# EAGLE board Brazo Robótico (EAGLE 7.6.0)

Size 73.58 x 63.39 mm. Coordinates in mm from the lower left corner, seen from the top.
Outline: 0,0 56.82,0 56.82,53.33 0,53.33 0,0
Copper layers (1*16): Top 0.035mm / dielectric 1.5mm / Bottom 0.035mm
Design rules "default": minimum track width 10mil, minimum drill 24mil, track to track 8mil, track to pad 8mil, pad to pad 8mil, via to via 8mil, smd to smd 8mil, copper to edge 40mil, drill to drill 8mil, minimum pad ring 10mil, minimum via ring 8mil, stop-mask expansion 4mil, vias tented up to drill 0mil, thermal gap 10mil

## Footprints (pad centres in the part's own frame; a part is rotated, then mirrored left to right if it is on the bottom)
0207/10 = drill 0.813 octagon: 1 -5.08,0; 2 5.08,0
B25V = drill 0.813 long: A 2.54,0.635; E -2.54,0.635; S 0,0.635
M251 = drill 0.813 long: 1 -2.54,0; 2 0,0; 3 2.54,0
TL1105 = drill 1 pad 1.676: 1 -2.25,3.25; 2 2.25,3.25; 3 -2.25,-3.25; 4 2.25,-3.25
1X3P-2.54-2.54-11.6-3.0-BLACK-MALE = drill 0.889 pad 1.651 square: 1 0,2.54 | drill 0.889 pad 1.651: 2 0,0; 3 0,-2.54
ARDUINO_UNO = drill 1.016 pad 1.88: 0 63.5,50.8; 1 60.96,50.8; 2 58.42,50.8; 3 55.88,50.8; 3.3V 35.56,2.54; 4 53.34,50.8; 5 50.8,50.8; 5V 38.1,2.54; 6 48.26,50.8; 7 45.72,50.8; 8 41.656,50.8; 9 39.116,50.8; 10 36.576,50.8; 11 34.036,50.8; 12 31.496,50.8; 13 28.956,50.8; A0 50.8,2.54; A1 53.34,2.54; A2 55.88,2.54; A3 58.42,2.54; A4 60.96,2.54; A5 63.5,2.54; AREF 23.876,50.8; GND 26.416,50.8; GND. 43.18,2.54; GND.. 40.64,2.54; I/OREF 30.48,2.54; N/C 27.94,2.54; RESET 33.02,2.54; SCL 18.796,50.8; SDA 21.336,50.8; VIN 45.72,2.54 | hole 3.2: 66.04,7.62; 66.04,35.56; 15.24,50.8; 13.97,2.54
1X16P-2.54-2.54-11.6-3.0-BLACK-MALE = drill 0.889 pad 1.651 square: 1 0,19.05 | drill 0.889 pad 1.651: 2 0,16.51; 3 0,13.97; 4 0,11.43; 5 0,8.89; 6 0,6.35; 7 0,3.81; 8 0,1.27; 9 0,-1.27; 10 0,-3.81; 11 0,-6.35; 12 0,-8.89; 13 0,-11.43; 14 0,-13.97; 15 0,-16.51; 16 0,-19.05

## Placement (x,y rotation side)
R2  220‎Ω  [0207/10]  5,48.18 0 top
R4  220‎Ω  [0207/10]  5,86.28 0 top  (outside the outline)
R6  220‎Ω  [0207/10]  5,98.98 0 top  (outside the outline)
Rpot1  250k‎Ω  [B25V]  5,35.48 0 top
Rpot2  250k‎Ω  [B25V]  5,225.98 0 top  (outside the outline)
Rpot3  250k‎Ω  [B25V]  5,162.48 0 top  (outside the outline)
Rpot4  250k‎Ω  [B25V]  5,175.18 0 top  (outside the outline)
Rpot5  250k‎Ω  [B25V]  5,187.88 0 top  (outside the outline)
Rpot6  250k‎Ω  [B25V]  5,200.58 0 top  (outside the outline)
S1  [M251]  5,238.68 0 top  (outside the outline)
S3  [TL1105]  5,60.88 0 top
S4  [TL1105]  5,73.58 0 top  (outside the outline)
SERVO1  [1X3P-2.54-2.54-11.6-3.0-BLACK-MALE]  5,213.28 0 top  (outside the outline)
SERVO3  [1X3P-2.54-2.54-11.6-3.0-BLACK-MALE]  5,111.68 0 top  (outside the outline)
SERVO6  [1X3P-2.54-2.54-11.6-3.0-BLACK-MALE]  5,124.38 0 top  (outside the outline)
SERVO7  [1X3P-2.54-2.54-11.6-3.0-BLACK-MALE]  5,137.08 0 top  (outside the outline)
SERVO8  [1X3P-2.54-2.54-11.6-3.0-BLACK-MALE]  5,149.78 0 top  (outside the outline)
U3  [ARDUINO_UNO]  5,10.08 0 top
U4  [1X16P-2.54-2.54-11.6-3.0-BLACK-MALE]  5,22.78 0 top

## Library data of the parts
R2 R4 R6 Rpot1-Rpot6 S1 S3 S4 SERVO1 SERVO3 SERVO6-SERVO8 U3 U4 = AUTODESK_CIRCUITS_BREADBOARD

## Nets
N$1: U3.13 U4.4
N$2: U3.12 U4.6
N$3: U3.8 U4.11
N$4: U3.4 U4.12
N$5: U3.3 U4.13
N$6: U3.2 U4.14
N$7: Rpot1.S U4.3
N$8: R2.2 U4.15
N$9: S3.4
N$10: R4.1 S3.1 U3.1
N$11: S3.3
N$12: S4.4
N$13: R6.1 S4.1 U3.0
N$14: S4.3
N$15: SERVO8.3 U3.6
N$16: SERVO7.3 U3.9
N$17: SERVO6.3 U3.10
N$18: SERVO3.3 U3.11
N$19: Rpot3.S U3.A0
N$20: Rpot4.S U3.A1
N$21: Rpot5.S U3.A2
N$22: Rpot6.S U3.A3
N$23: SERVO1.3 U3.5
N$24: Rpot2.S U3.A4
N$25: S1.2 U3.7
N$26: Rpot1.E Rpot2.E Rpot3.A Rpot4.A Rpot5.A Rpot6.A S1.1 S3.2 S4.2 SERVO1.1 SERVO3.1 SERVO6.1 SERVO7.1 SERVO8.1 U3.GND.. U4.1 U4.5 U4.16
N$27: R2.1 R4.2 R6.2 Rpot1.A Rpot2.A Rpot3.E Rpot4.E Rpot5.E Rpot6.E S1.3 SERVO1.2 SERVO3.2 SERVO6.2 SERVO7.2 SERVO8.2 U3.5V U4.2

## Tracks (layer width: path | path; a pad name or v marks a point on that pad's centre or on a via)
N$1  (1 unrouted)
N$2  (1 unrouted)
N$3  (1 unrouted)
N$4  (1 unrouted)
N$5  (1 unrouted)
N$6  (1 unrouted)
N$7  (1 unrouted)
N$8  (1 unrouted)
N$10  (2 unrouted)
N$13  (2 unrouted)
N$15  (1 unrouted)
N$16  (1 unrouted)
N$17  (1 unrouted)
N$18  (1 unrouted)
N$19  (1 unrouted)
N$20  (1 unrouted)
N$21  (1 unrouted)
N$22  (1 unrouted)
N$23  (1 unrouted)
N$24  (1 unrouted)
N$25  (1 unrouted)
N$26  (17 unrouted)
N$27  (16 unrouted)